# EAGLE board mega-halfshield-MOB (EAGLE 8.3.2)
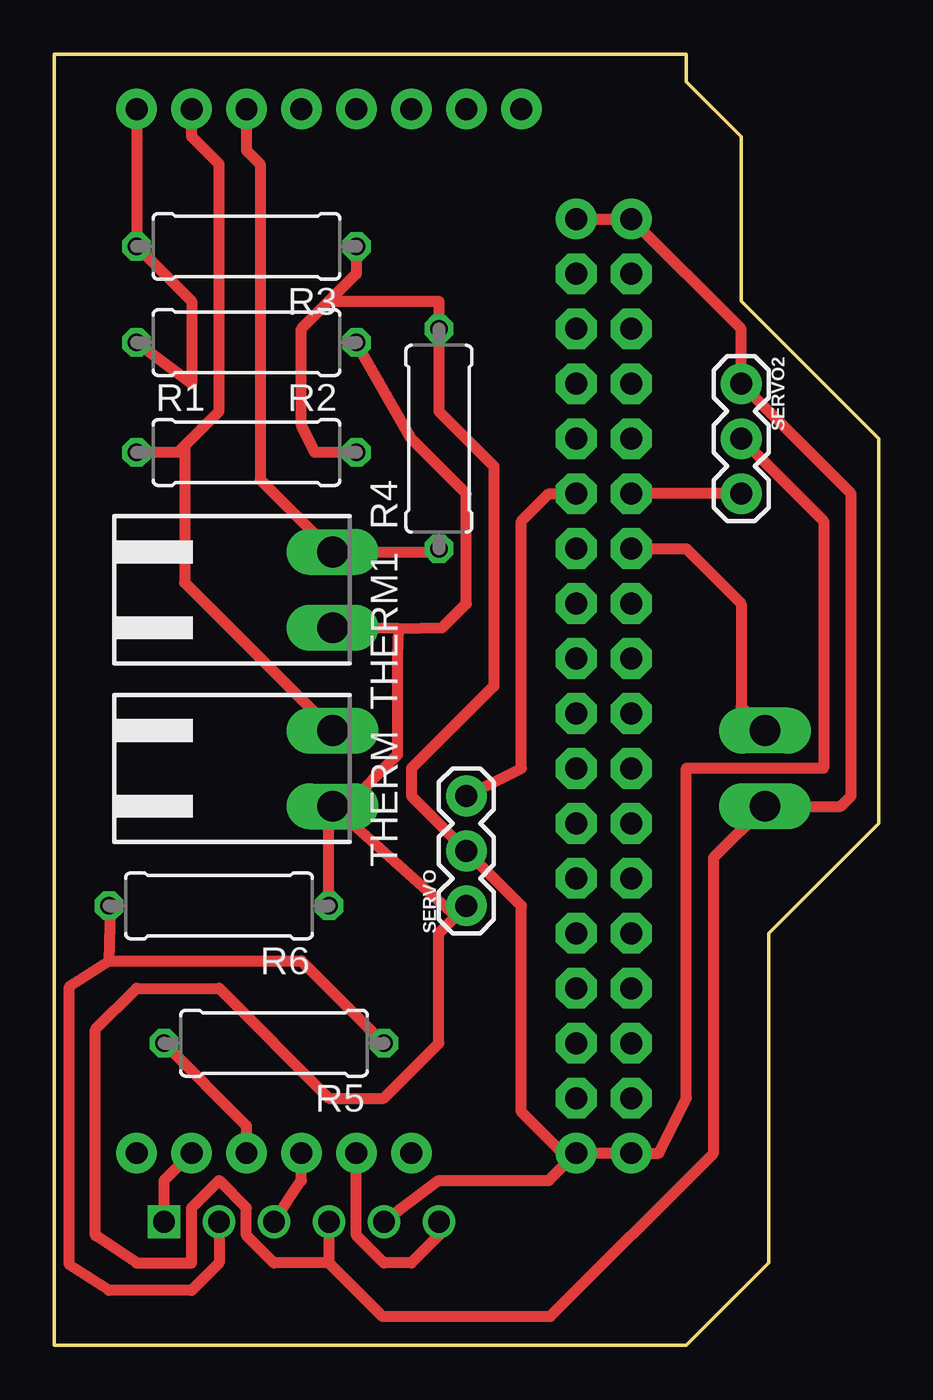
[diagram p0: board, top side]
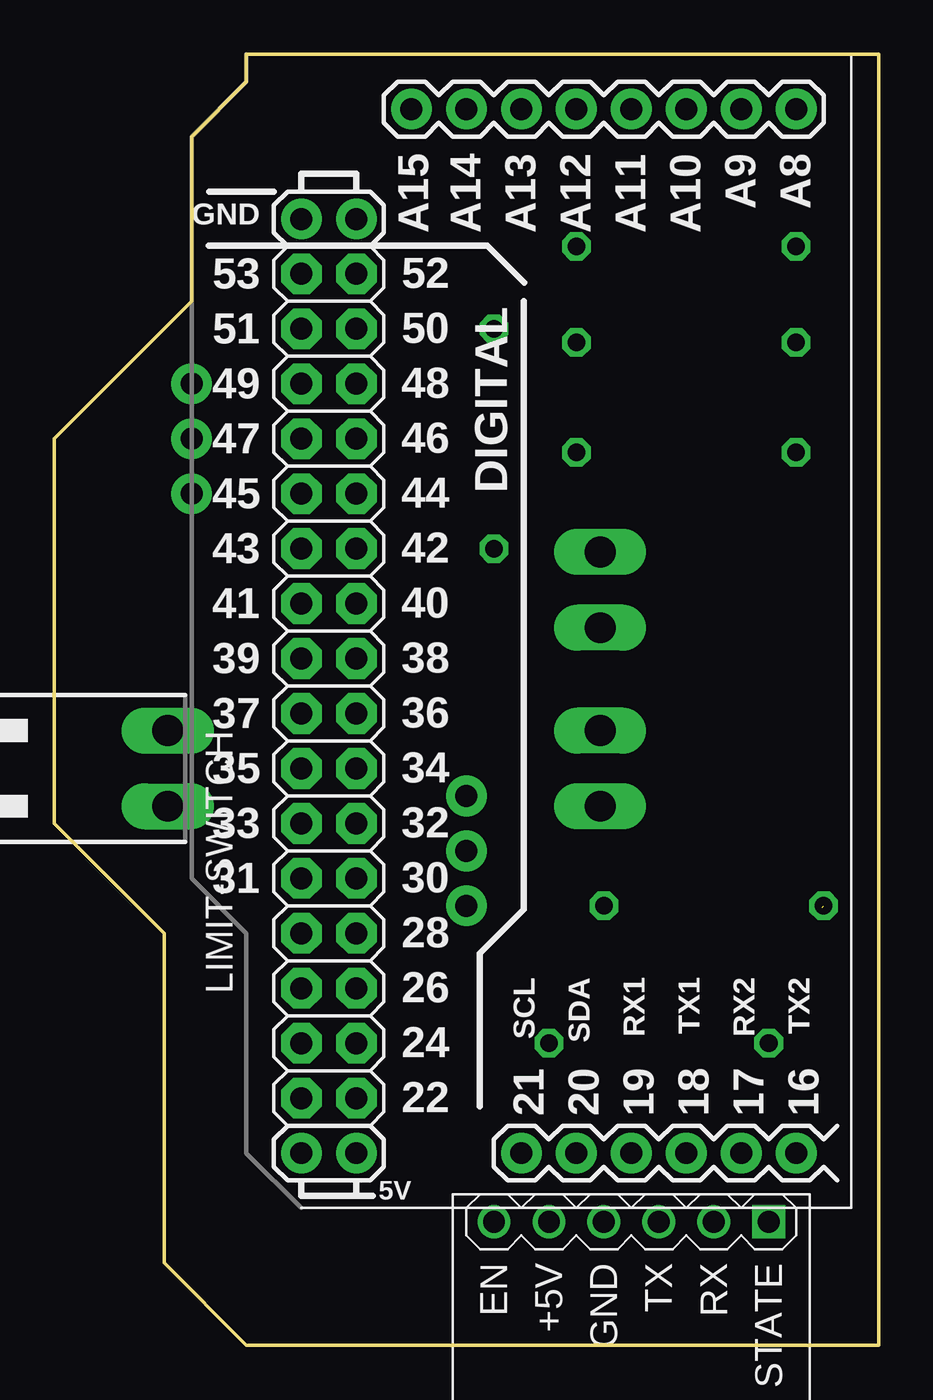
[diagram p1: board, bottom side, seen from below]

Size 38.1 x 59.69 mm. Coordinates in mm from the lower left corner, seen from the top.
Outline: 0,59.69 0,0 29.21,0 33.02,3.81 33.02,19.05 38.1,24.13 38.1,41.91 31.75,48.26 31.75,55.88 29.21,58.42 29.21,59.69 0,59.69
Copper layers (1*16): Top 0.035mm / dielectric 1.5mm / Bottom 0.035mm
Design rules "default": minimum track width 6mil, minimum drill 0.35mm, track to track 6mil, track to pad 6mil, pad to pad 6mil, via to via 6mil, smd to smd 6mil, copper to edge 40mil, drill to drill 6mil, minimum pad ring 10mil, minimum via ring 8mil, stop-mask expansion 4mil, vias tented up to drill 0mil, thermal gap 10mil
Net classes: 0 default: width 0.15 mm, drill 0.3 mm, clearance 0.15 mm; 1 high current: width 1.27 mm, drill 0.3 mm, clearance 0.15 mm

## Footprints (pad centres in the part's own frame; a part is rotated, then mirrored left to right if it is on the bottom)
90-2 = drill 1.422 long: 1 -1.75,5.25; 2 1.75,5.25
0309/10 = drill 0.813 octagon: 1 -5.08,0; 2 5.08,0
1X03 = drill 1.016 pad 1.88: 1 0,0; 2 2.54,0; 3 5.08,0
ARDUINO_MEGA_HALFSHIELD = drill 1.016 pad 1.88: 5V@1 2.54,39.37; 5V@2 5.08,39.37; 16 -17.78,39.37; 17 -15.24,39.37; 18 -12.7,39.37; 19 -10.16,39.37; 20 -7.62,39.37; 21 -5.08,39.37; A8 -17.78,-8.89; A9 -15.24,-8.89; A10 -12.7,-8.89; A11 -10.16,-8.89; A12 -7.62,-8.89; A13 -5.08,-8.89; A14 -2.54,-8.89; A15 0,-8.89; GND@2 2.54,-3.81; GND@3 5.08,-3.81 | drill 1.016 pad 1.88 octagon: 22 2.54,36.83; 23 5.08,36.83; 24 2.54,34.29; 25 5.08,34.29; 26 2.54,31.75; 27 5.08,31.75; 28 2.54,29.21; 29 5.08,29.21; 30 2.54,26.67; 31 5.08,26.67; 32 2.54,24.13; 33 5.08,24.13; 34 2.54,21.59; 35 5.08,21.59; 36 2.54,19.05; 37 5.08,19.05; 38 2.54,16.51; 39 5.08,16.51; 40 2.54,13.97; 41 5.08,13.97; 42 2.54,11.43; 43 5.08,11.43; 44 2.54,8.89; 45 5.08,8.89; 46 2.54,6.35; 47 5.08,6.35; 48 2.54,3.81; 49 5.08,3.81; 50 2.54,1.27; 51 5.08,1.27; 52 2.54,-1.27; 53 5.08,-1.27
WIRELESS-BLUETOOTH-HC-05 = drill 1 square: 1 -6.35,-17.145 | drill 1: 2 -3.81,-17.145; 3 -1.27,-17.145; 4 1.27,-17.145; 5 3.81,-17.145; 6 6.35,-17.145

## Placement (x,y rotation side)
LIMIT-SWITCH  [90-2]  38.1,26.67 270 bottom
R1  [0309/10]  8.89,41.28 0 top
R2  [0309/10]  8.89,46.36 180 top
R3  [0309/10]  8.89,50.8 180 top
R4  [0309/10]  17.78,41.91 90 top
R5  [0309/10]  10.16,13.97 180 top
R6  [0309/10]  7.62,20.32 180 top
SERVO  Mag-Servo  [1X03]  19.05,20.32 90 top
SERVO2  Fluo-Servo  [1X03]  31.75,44.45 270 top
THERM  BC-therm  [90-2]  7.62,26.67 270 top
THERM1  PCR-therm  [90-2]  7.62,34.92 270 top
U$1  ARDUINO_MEGA_R3_HALFSHIELD  [ARDUINO_MEGA_HALFSHIELD]  21.59,48.26 180 bottom
U$2  WIRELESS-BLUETOOTH-HC-05  [WIRELESS-BLUETOOTH-HC-05]  11.43,-11.43 180 bottom

## Library data of the parts
LIMIT-SWITCH THERM THERM1 = con-weidmueller-sl35; OC_FARNELL: unknown; OC_NEWARK: unknown
R1-R6 = rcl
SERVO SERVO2 = SparkFun-Connectors
U$1 = alex.trick
U$2 = diy-modules

## Nets
+5V [high current]: R1.2 R3.1 R4.2 SERVO2.2 SERVO.2 U$1.5V@1 U$1.5V@2 U$2.5
A8: R2.2 R3.2 U$1.A8
A9: R1.1 THERM.1 U$1.A9
A10: R4.1 THERM1.1 U$1.A10
GND [high current]: LIMIT-SWITCH.2 R2.1 R6.1 SERVO2.1 SERVO.1 THERM1.2 THERM.2 U$1.GND@2 U$1.GND@3 U$2.4
N$1: LIMIT-SWITCH.1 U$1.43
N$2: R5.1 R6.2 U$2.2
P17: U$1.17 U$2.1
P18-TX1: R5.2 U$1.18
P19-RX1: U$1.19 U$2.3
P20: U$1.20 U$2.6
P44: SERVO.3 U$1.44
P45: SERVO2.3 U$1.45

## Tracks (layer width: path | path; a pad name or v marks a point on that pad's centre or on a via)
+5V
  Top 0.508: U$1.5V@1 U$1.5V@2 27.94,8.89 29.21,11.43 29.21,26.67 35.56,26.67 35.56,38.1 SERVO2.2 | U$2.5 17.78,7.62 22.86,7.62 U$1.5V@1 | R1.2 12.06,41.28 11.43,42.55 11.43,46.99 12.7,48.26 | 12.7,48.26 17.78,48.26 R4.2 17.78,43.18 20.32,40.64 20.32,30.48 16.51,26.67 16.51,25.4 SERVO.2 21.59,20.32 21.59,10.79 23.49,8.89 U$1.5V@1 | R3.1 13.97,49.53 12.7,48.26
A8
  Top 0.508: U$1.A8 R3.2 6.35,48.26 6.35,44.45 R2.2
A9
  Top 0.508: R1.1 5.71,41.28 6.03,41.59 | 6.03,41.59 7.62,43.18 7.62,54.61 6.35,55.88 U$1.A9 | 6.03,41.59 6.03,35.26 THERM.1
A10
  Top 0.508: U$1.A10 8.89,55.25 9.52,54.61 9.52,40.02 THERM1.1 17.62,36.67 R4.1
GND
  Top 0.508: THERM.2 18.57,19.84 SERVO.1 17.78,19.05 17.78,13.97 15.24,11.43 12.7,11.43 7.62,16.51 3.81,16.51 1.91,14.61 1.91,5.08 3.81,3.81 6.35,3.81 6.35,6.35 7.62,7.62 8.89,6.35 8.89,5.08 10.16,3.81 12.7,3.81 | U$1.GND@2 U$1.GND@3 31.75,46.99 SERVO2.1 36.83,39.37 36.83,25.4 36.35,24.92 LIMIT-SWITCH.2 30.48,22.55 30.48,8.89 22.94,1.35 15.16,1.35 12.7,3.81 | U$2.4 12.7,3.81 | 15.92,33.13 THERM1.2 | 15.92,33.13 17.93,33.17 19.05,34.29 19.05,39.37 16.51,41.91 R2.1 | R6.1 12.7,24.75 THERM.2 | THERM.2 13.49,24.92 15.88,27.31 15.88,31.81 15.92,33.13
N$1
  Top 0.508: U$1.43 29.21,36.83 31.75,34.29 31.75,29.52 LIMIT-SWITCH.1
N$2  (1 unrouted)
  Top 0.508: 7.62,5.08 U$2.2 7.62,3.81 6.35,2.54 2.54,2.54 0.71,3.73 0.71,16.59 2.54,17.78 | 13.97,15.24 R5.1 11.43,17.78 2.54,17.78 | 2.54,17.78 2.62,20.24
P17
  Top 0.508: U$2.1 5.08,7.62 U$1.17
P18-TX1
  Top 0.508: R5.2 8.89,10.16 U$1.18
P19-RX1
  Top 0.508: U$2.3 11.43,7.62 U$1.19
P20
  Top 0.508: U$2.6 17.78,5.08 16.51,3.81 15.24,3.81 13.97,5.08 U$1.20
P44
  Top 0.508: SERVO.3 21.59,26.67 21.59,38.1 22.86,39.37 U$1.44
P45
  Top 0.508: SERVO2.3 U$1.45